# Altium PCB Statron_RP2040.PcbDoc
Units mil, origin at the board's own origin, x right, y up, seen from the top; angles counter-clockwise.
Board outline 1075 x 1465 mil, 2 copper layers (Top Layer, Bottom Layer); 66 components, 43 nets, 215 pads, 76 vias.
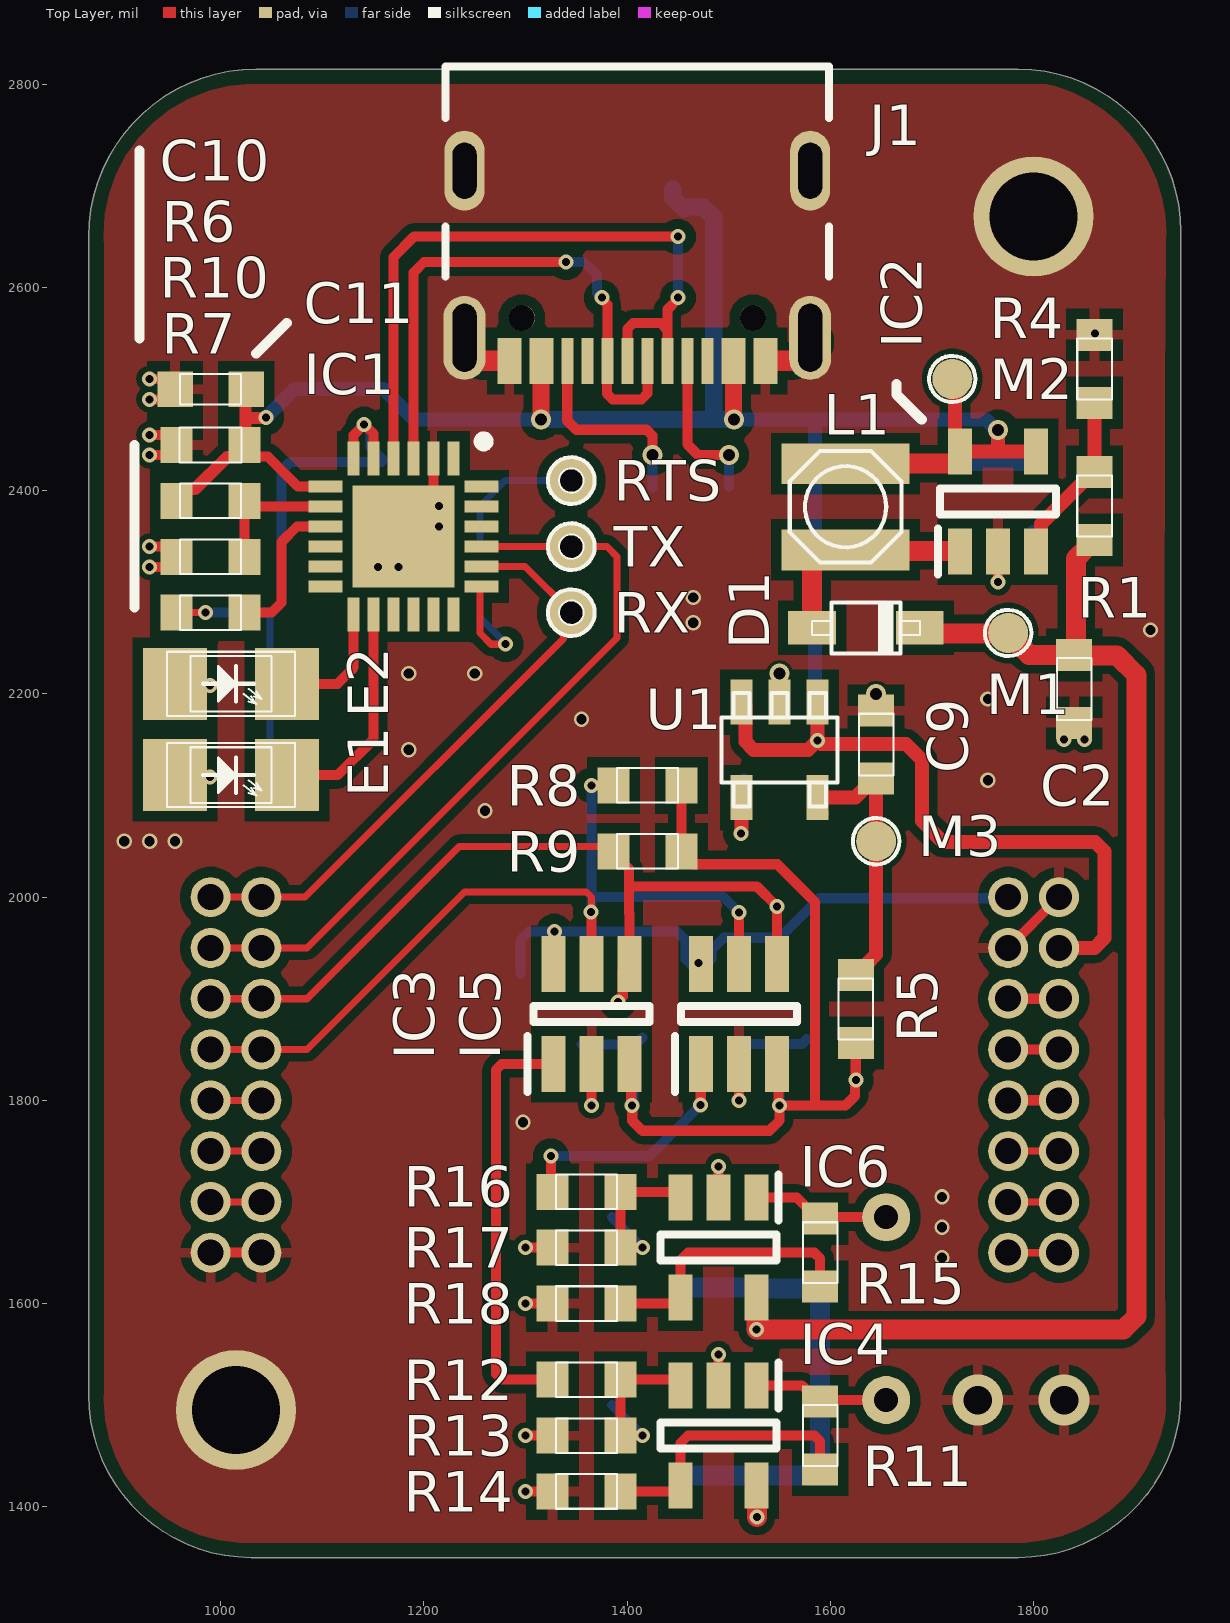
[diagram p0: Top Layer view]
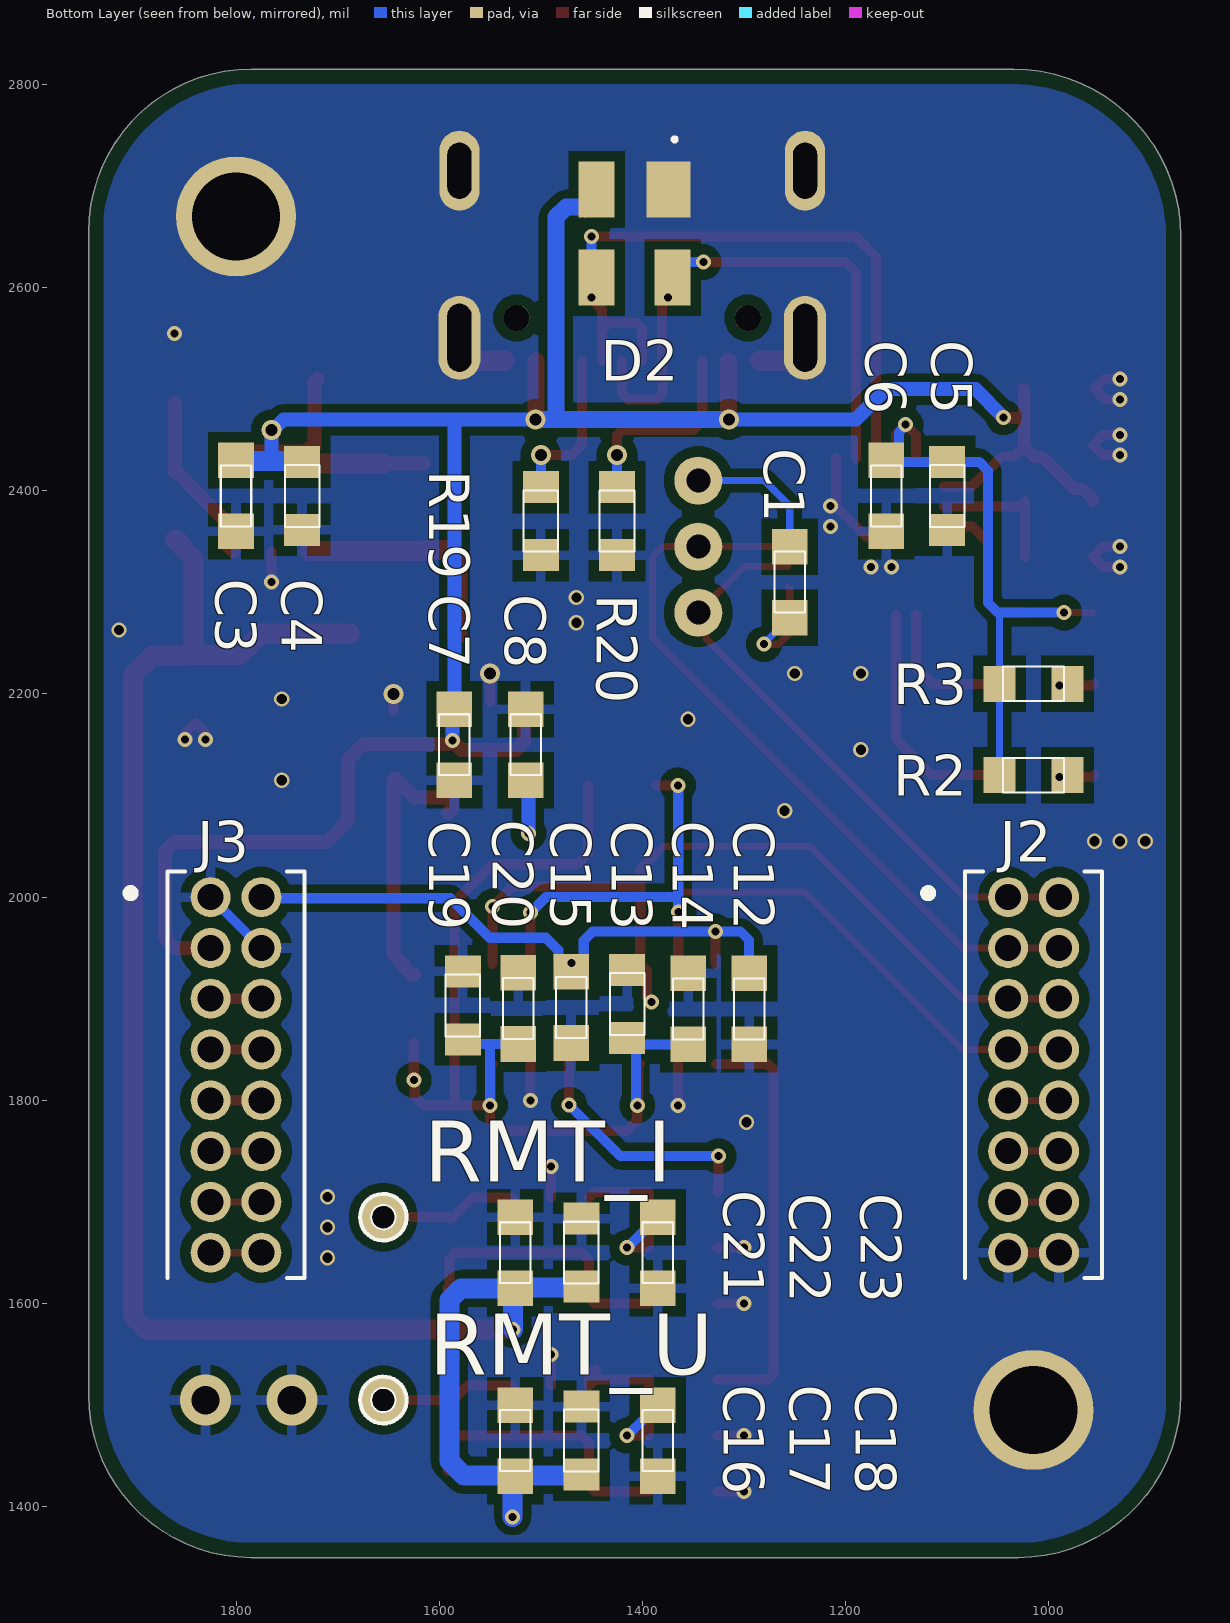
[diagram p1: Bottom Layer view, seen from below]
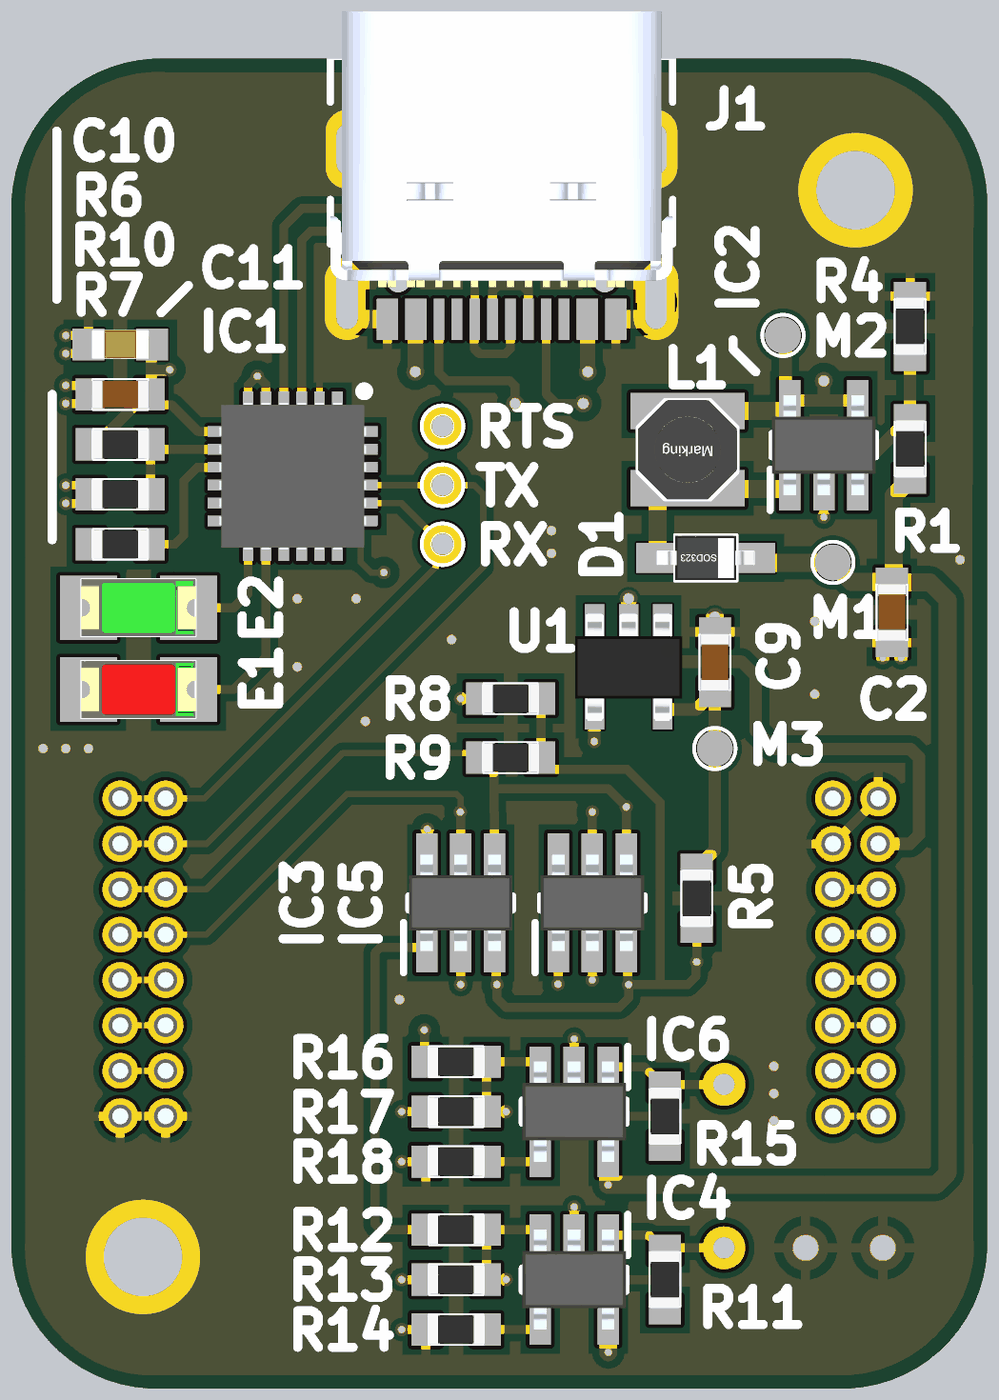
[diagram p2: 3D render of the assembled board from above, using the file's embedded part models]
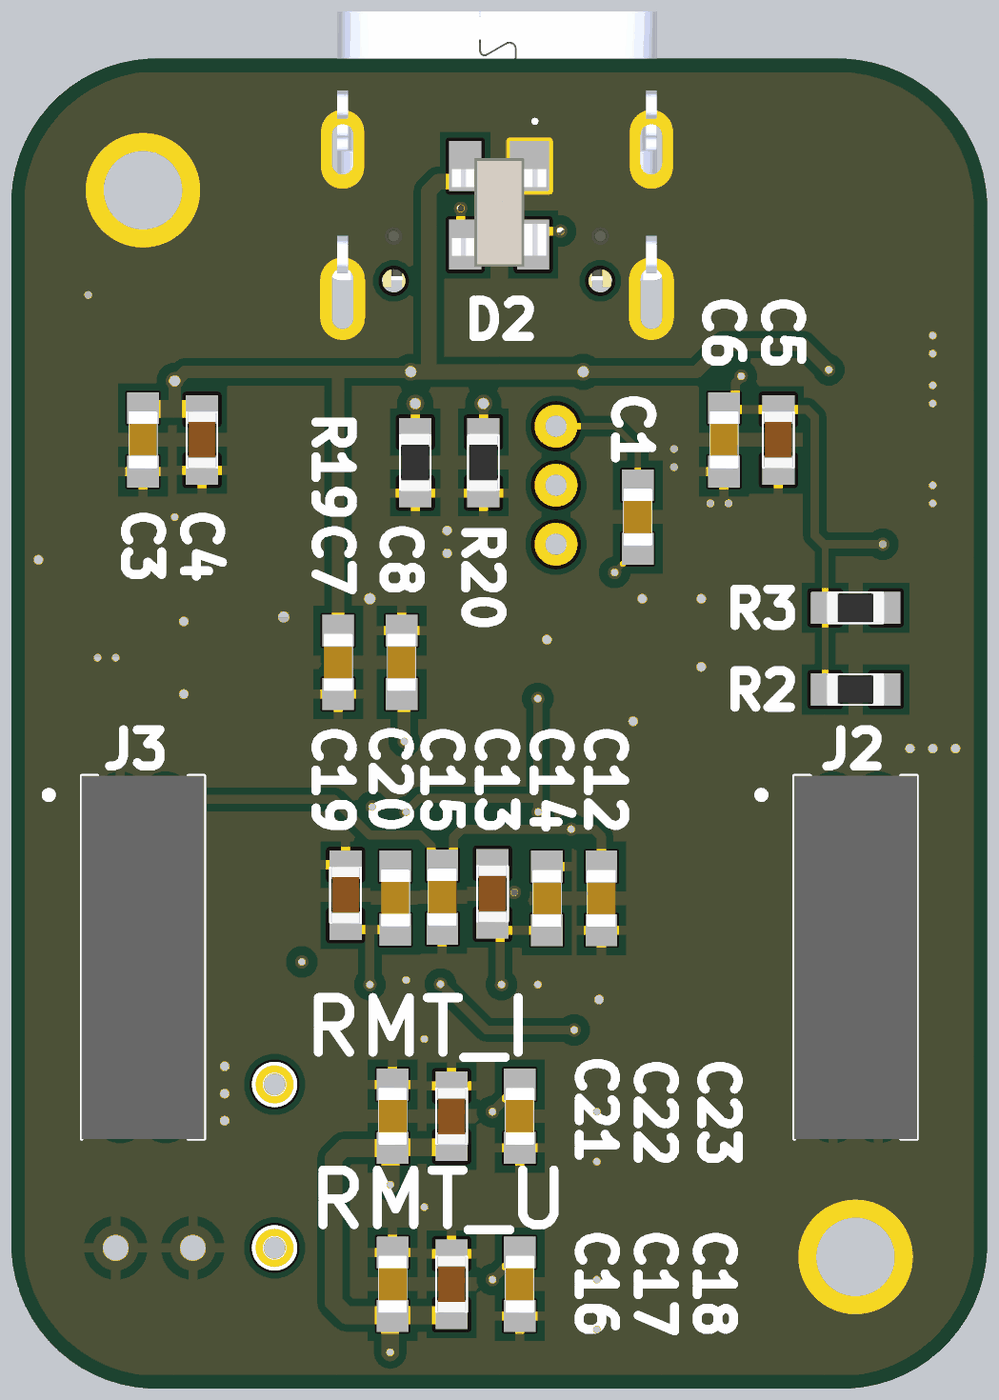
[diagram p3: 3D render of the assembled board from below, using the file's embedded part models]

## Layer stack, top to bottom
Top Solder: solder mask 0.4, Solder Resist, Dk 3.5
Top Layer: signal copper 1.4
Dielectric 1: dielectric 12.6, FR-4, Dk 4.8
Bottom Layer: signal copper 1.4
Bottom Solder: solder mask 0.4, Solder Resist, Dk 3.5

## Board outline
1035,2815 1785,2815 cw(c1785,2655) 1945,2655 1945,1510 cw(c1785,1510) 1785,1350 1030,1350 cw(c1030,1510) 870,1510 870,2650 cw(c1035,2650)

## Design rules (kind name [scope] priority, off if disabled: settings)
Clearance [All] p1: gap=10 ignorepadtopadclearanceinfootprint=FALSE except(5: Arc-Arc Arc-Track Arc-SMDPad Arc-Via Track-Track Track-SMDPad Track-Via SMDPad-SMDPad; 8: Arc-Fill Arc-Poly Arc-Region Arc-Text Track-Fill Track-Poly Track-Region Track-Text SMDPad-Text SMDPad-Hole THPad-Text Via-Text Fill-Text Poly-Text Region-Text Text-Text)
HoleSize [All] p1: absolutevalues=TRUE maxlimit=100 minlimit=7.87 maxpercent=80.000 minpercent=20.000
PolygonConnect [All] p1: connectstyle=Relief reliefconductorwidth=10 reliefentries=4 polygonreliefangle="90 Angle" airgapwidth=10
RoutingVias [All] p1: holewidth=28 width=50 viastyle="Through Hole" minholewidth=28 minwidth=50 maxholewidth=28 maxwidth=50
SilkToSilkClearance [All] p1: silktosilkclearance=5
SolderMaskExpansion [All] p1: expansion=4 istentingtop=FALSE
UnRoutedNet [All] p1: checkbadconnections=TRUE
Width [All] p1: maxlimit=40 minlimit=5 preferedwidth=16 minimp=50.000000 maximp=50.000000 favimp=50.000000
27 further rules are at their usual default settings.

## Components (designator, comment, footprint, x,y, rotation, side; value= is the part's Value field where it differs from the comment)
C1 "100n" C0603M 1255,2310 r270 bottom value=100n/16V
C2 "4u7" C0603 1840,2205 r90 top value=4u7/6,3V
C3 "100n" C0603M 1800,2395 r270 bottom value=100n/16V
C4 "4u7" C0603 1735,2395 r270 bottom value=4u7/6,3V
C5 "4u7" C0603 1100,2395 r270 bottom value=4u7/6,3V
C6 "100n" C0603M 1160,2395 r270 bottom value=100n/16V
C7 "100n" C0603M 1585,2150 r270 bottom value=100n/16V
C8 "10n" C0603M 1515,2150 r90 bottom
C9 "4u7" C0603 1645,2150 r90 top value=4u7/6,3V
C10 "4u7" C0603 990,2445 r180 top value=4u7/6,3V
C11 "100n" C0603M 990,2500 r180 top value=100n/16V
C12 "100n" C0603M 1295,1890 r270 bottom value=100n/16V
C13 "4u7" C0603 1415,1895 r270 bottom value=4u7/6,3V
C14 "100n" C0603M 1355,1890 r270 bottom value=100n/16V
C15 "100n" C0603M 1470.21,1891.43 r270 bottom value=100n/16V
C16 "100n" C0603M 1525,1465 r90 bottom value=100n/16V
C17 "4u7" C0603 1460,1465 r270 bottom value=4u7/6,3V
C18 "10n" C0603M 1385,1465 r270 bottom
C19 "4u7" C0603 1576.79,1893.53 r270 bottom value=4u7/6,3V
C20 "100n" C0603M 1522.05,1890.46 r270 bottom value=100n/16V
C21 "100n" C0603M 1525,1650 r90 bottom value=100n/16V
C22 "4u7" C0603 1460,1650 r270 bottom value=4u7/6,3V
C23 "10n" C0603M 1385,1650 r270 bottom
D1 "PMEG4005" SOD323 1635,2265 r0 top
D2 "SP0503BAHTG" SP0503BAHTG 1407.6,2653.31 r0 bottom
E1 "KP-3216ID" "LED1206 R" 1010,2120 r0 top value=Red
E2 "KP-3216SGD" "LED1206 G" 1010,2210 r0 top value=Green
IC1 "CP2102N-A02-GQFN24R" QFN50P400X400X80-25N-D 1180,2355 r270 top
IC2 "LM2703MF-ADJ_NOPB" SOT95P280X145-5N 1765,2389.21 r90 top
IC3 "MCP4726A3T-E_CH" SOT95P270X145-6N 1365,1885 r90 top
IC4 "OPA735AIDBVT" SOT95P280X145-5N 1490,1470 r270 top
IC5 "MCP4726A4T-E_CH" SOT95P270X145-6N 1510,1885 r90 top
IC6 "OPA735AIDBVT" SOT95P280X145-5N 1490,1655 r270 top
J1 "USB4105-GF-A" GCT_USB4105-GF-A 1410,2715 r180 top locked
J2 "20021111-00016T4LF" 2002111100016T4LF 1040,2000 r270 bottom locked
J3 "20021111-00016T4LF" 2002111100016T4LF 1825,2000 r270 bottom locked
L1 "10uH/630mA" L_HEXAGON_2.8x2.8_H1.3_SMD_WE-TPC_2813 1615,2384.21 r90 top
M1 "TP" "Pad 1mm SMD" 1775,2260 r90 top
M2 "TP" "Pad 1mm SMD" 1720,2510 r90 top
M3 "TP" "Pad 1mm SMD" 1645,2055 r270 top
R1 "180K" R0603 1860,2385 r270 top
R2 "1K" R0603 1015,2120 r180 bottom
R3 "1K" R0603 1015,2210 r180 bottom
R4 "27K" R0603 1860,2520 r270 top
R5 "0R" R0603 1625,1890 r90 top
R6 "22K" R0603 990,2390 r0 top
R7 "1K" R0603 990,2280 r180 top
R8 "22K" R0603 1420,2110 r180 top
R9 "22K" R0603 1420,2045 r180 top
R10 "47K" R0603 990,2335 r180 top
R11 "22K" R0603 1590,1470 r90 top
R12 "10K" R0603 1360,1525 r180 top
R13 "10K" R0603 1360,1470 r180 top
R14 "10K" R0603 1360,1415 r180 top
R15 "22K" R0603 1590,1650 r90 top
R16 "10K" R0603 1360,1710 r180 top
R17 "10K" R0603 1360,1655 r180 top
R18 "10K" R0603 1360,1600 r180 top
R19 "56K-50" R0603 1500,2370 r90 bottom
R20 "56K-50" R0603 1425,2370 r90 bottom
RMT_I "TP" Pad0.6mm 1655,1685 r90 bottom
RMT_U "TP" Pad0.6mm 1655,1505 r90 bottom
RTS "TP" Pad0.6mm 1345,2410 r0 top (schematic designator RTS1)
RX "TP" Pad0.6mm 1345,2280 r0 top (schematic designator UART_RX1)
TX "TP" Pad0.6mm 1345,2345 r0 top (schematic designator UART_TX1)
U1 "LP2985AIM5-3.3" SOT23-5 1550,2145 r180 top

## Footprints (in the part's own frame and the unit in brackets; to place one, negate y for a bottom-side part, rotate by r counter-clockwise, add the part's x,y. Pads: shape width x height; smd on the part's side, far side on the other; paste and mask are expansions set on the pad)
2002111100016T4LF [mm]
  round 1 hole 0.65: 1(0,0) 2(0,1.27) 3(1.27,0) 4(1.27,1.27) 5(2.54,0) 6(2.54,1.27) 7(3.81,0) 8(3.81,1.27) 9(5.08,0) 10(5.08,1.27) 11(6.35,0) 12(6.35,1.27) 13(7.62,0) 14(7.62,1.27) 15(8.89,0) 16(8.89,1.27)
  silkscreen extent -0.64,-2.1 9.53,2.35, body extent -0.64,-1.08 9.53,2.35, height 5.6
C0603 [mm] "Chip Capacitor 0603"
  rect 0.8x0.9 smd: 1(-0.85,0) 2(0.85,0)
  silkscreen extent -0.77,-0.43 0.77,0.43, body extent -0.8,-0.4 0.8,0.4, height 0.6
C0603M [mil]
  rect 35x35 smd mask+2: 1(-35,0) 2(35,0)
  silkscreen extent -30,-15 30,15, body extent -31,-16 31,16, height 35
GCT_USB4105-GF-A [mm]
  rect 0.6x1.15 smd: A1_B12(-3.2,4.755) A4_B9(-2.4,4.755) B1_A12(3.2,4.755) B4_A9(2.4,4.755)
  rect 0.3x1.15 smd: A5(-1.25,4.755) A6(-0.25,4.755) A7(0.25,4.755) A8(1.25,4.755) B5(1.75,4.755) B6(0.75,4.755) B7(-0.75,4.755) B8(-1.75,4.755)
  oval 1.05x2.1 hole 0.6 slot 1.7 at 90 deg: S1(-4.32,4.18) S4(4.32,4.18)
  oval 1x2 hole 0.6 slot 1.4 at 90 deg: S2(-4.32,0) S3(4.32,0)
  round 0.65 hole 0.65 unplated: ""(-2.89,3.68) ""(2.89,3.68)
  silkscreen extent -4.79,-2.6 4.79,2.65, body extent -4.79,-3.86 4.79,3.86, height 3.31
L_HEXAGON_2.8x2.8_H1.3_SMD_WE-TPC_2813 [mil] "SMT power inductor"
  rect 40x126 smd: 1(-42.5,0) 2(42.5,0)
  silkscreen extent -55,-55 55,55, body extent -55,-55 55,55, height 48
"LED1206 G" [mm] "LED CASE 1206 .113 CTRS"
  rect 1.6x1.8 smd: 1(-1.4,0) 2(1.4,0)
  silkscreen extent -1.6,-0.8 1.6,0.8, body extent -1.61,-0.8 1.61,0.8, height 1.1
"LED1206 R" [mm] "LED CASE 1206 .113 CTRS"
  rect 1.6x1.8 smd: 1(-1.4,0) 2(1.4,0)
  silkscreen extent -1.6,-0.8 1.6,0.8, body extent -1.61,-0.8 1.61,0.8, height 1.1
Pad0.6mm [mm] "Pad (neosazuje se)"
  round 1.2 hole 0.6: 1(0,0)
  silkscreen extent -0.58,-0.58 0.58,0.58
"Pad 1mm SMD" [mm] "Pad (neosazuje se)"
  round 1 smd mask+0.051: 1(0,0)
  silkscreen extent -0.58,-0.58 0.58,0.58
QFN50P400X400X80-25N-D [mm]
  rect 0.85x0.3 smd: 1(-1.95,1.25) 2(-1.95,0.75) 3(-1.95,0.25) 4(-1.95,-0.25) 5(-1.95,-0.75) 6(-1.95,-1.25) 13(1.95,-1.25) 14(1.95,-0.75) 15(1.95,-0.25) 16(1.95,0.25) 17(1.95,0.75) 18(1.95,1.25)
  rect 0.3x0.85 smd: 7(-1.25,-1.95) 8(-0.75,-1.95) 9(-0.25,-1.95) 10(0.25,-1.95) 11(0.75,-1.95) 12(1.25,-1.95) 19(1.25,1.95) 20(0.75,1.95) 21(0.25,1.95) 22(-0.25,1.95) 23(-0.75,1.95) 24(-1.25,1.95)
  rect 2.55x2.55 smd: 25(0,0)
  silkscreen extent -2.5,1.88 -2.25,2.13, body extent -2.05,-2.05 2.05,2.05, height 0.8
R0603 [mm] "Chip Resistor 0603"
  rect 0.8x0.9 smd: 1(-0.85,0) 2(0.85,0)
  silkscreen extent -0.76,-0.43 0.76,0.43, body extent -0.8,-0.4 0.8,0.4, height 0.4
SOD323 [mil] "Schottky Barrier Rectifier"
  rect 47x33 smd paste+0 mask+2: 1(-53,0) 2(53,0)
  silkscreen extent -53,-25 53,25, body extent -53,-25 53,25, height 43
SOT23-5 [mil] "0,95 rozteè, 0,4mm mezera, 2.9x1,6mm"
  rect 21.65x44 smd mask+2: 1(-37.5,-47) 2(0,-47) 3(37.5,-47) 4(37.5,47) 5(-37.5,47)
  silkscreen extent -57,-56 57,56, body extent -59,-58 59,60, height 57
SOT95P270X145-6N [mm]
  rect 1.4x0.6 smd: 1(-1.25,0.95) 2(-1.25,0) 3(-1.25,-0.95) 4(1.25,-0.95) 5(1.25,0) 6(1.25,0.95)
  silkscreen extent -1.95,-1.45 0.2,1.6, body extent -1.35,-1.45 1.35,1.45, height 1.45
SOT95P280X145-5N [mm]
  rect 1.15x0.6 smd: 1(-1.25,0.95) 2(-1.25,0) 3(-1.25,-0.95) 4(1.25,-0.95) 5(1.25,0.95)
  silkscreen extent -1.83,-1.45 0.33,1.5, body extent -1.4,-1.45 1.4,1.45, height 1.45
SP0503BAHTG [mm]
  rect 1.1x1.4 smd: 1(-0.85,-1.1)
  rect 0.9x1.4 smd: 2(0.95,-1.1) 3(0.95,1.1) 4(-0.95,1.1)
  silkscreen extent -1.05,-2.4 -0.95,-2.3, body extent -1.32,-1.32 1.32,1.72, height 1.23

## Part data
C1 C3 C6 C11 C12 C14 C15 C16 C20 C21: library part CMP-UN-000268-1, "Ceramic Capacitor X7R", Manufacturer=VISHAY, Manufacturer Part Number="100n/16V X7R C0603", Category="Capacitors CERA SMD", Component Type=Capacitors, Main=Capacitors, Part Number="100n/16V X7R C0603", SMD/THD=SMD, Status=X, Stock number=10003450
C2 C4 C5 C9 C10 C13 C17 C19 C22: library part CMP-UN-000401-1, "Ceramic Capacitor X5R", Manufacturer=Murata, Manufacturer Part Number=GRM188R60J475KE19J, Category="Capacitors CERA SMD", Component Type=Capacitors, ComponentLink1Description=Datasheet, ComponentLink1URL=http://datasheet.octopart.com/GRM188R60J475KE19J-Murata-datasheet-14401031.pdf, Main=Capacitors, Part Number=GRM188R60J475KE19J, SMD/THD=SMD, Status=T, Stock number=10006168
C7: library part UniversalCapacitor, "Ceramic Capacitor X7R", Manufacturer=VISHAY, Part Number="100n/16V X7R C0603", Category="Capacitors CERA SMD", Main=Capacitors, SMD/THD=SMD, Status=X, Stock number=10003450
C8 C18 C23: library part UniversalCapacitor, "Ceramic Capacitor X7R", Manufacturer=VISHAY, Part Number="10n/50V X7R C0603", Category="Capacitors CERA SMD", Main=Capacitors, SMD/THD=SMD, Status=A, Stock number=10002497
D1: library part CMP-UN-000984-1, "Schottky Diode 40V, 500mA", Manufacturer=NXP, Part Number=PMEG4005AEA, Category=Schottky, ComponentLink1Description=Datasheet, ComponentLink1URL=http://www.farnell.com/datasheets/684565.pdf, Main=Diodes, SMD/THD=SMD, Status=A, Stock number=10004763
D2: "TVS Diode (Uni-directional)", Manufacturer_Name=LITTELFUSE, Height=1.22mm, Manufacturer_Part_Number=SP0503BAHTG
E1: library part CMP-UN-001017-1, "SMD LED Red", Manufacturer=KINGBRIGHT, Category=LED, ComponentLink1Description=Datasheet, ComponentLink1URL=http://www.tme.eu/en/details/kp-3216id/smd-leds-1206/kingbright-electronic/, Main=Diodes, Part Number=KP-3216ID, SMD/THD=SMD, Status=A, Stock number=10005421
E2: library part CMP-UN-001018-1, "SMD LED Green", Manufacturer=KINGBRIGHT, Category=LED, ComponentLink1Description=Datasheet, ComponentLink1URL=http://www.tme.eu/en/details/kp-3216sgd/smd-leds-1206/kingbright-electronic/, Main=Diodes, Part Number=KP-3216SGD, SMD/THD=SMD, Status=A, Stock number=10005422
IC1: "Integrated Circuit", Manufacturer_Name="Silicon Labs", Mouser2 Part Number=634-CP2102NA02QFN24R, Datasheet Link=https://componentsearchengine.com//CP2102N-A02-GQFN24R.pdf, Height=0.8mm, Manufacturer_Part_Number=CP2102N-A02-GQFN24R, Mouser2 Price/Stock=https://www.mouser.com/Search/Refine.aspx?Keyword=634-CP2102NA02QFN24R
IC2: "Integrated Circuit", Manufacturer_Name="Texas Instruments", Manufacturer_Part_Number=LM2703MF-ADJ/NOPB, Datasheet Link=https://datasheet.datasheetarchive.com/originals/distributors/Datasheets-SFU2/DSASFU100036636.pdf, Height=1.45mm
IC3: "Integrated Circuit", Manufacturer_Name=Microchip, Manufacturer_Part_Number=MCP4726A3T-E/CH, Mouser2 Part Number=579-MCP4726A3TECH, Datasheet Link=https://componentsearchengine.com//MCP4726A3T-E_CH.pdf, Height=1.45mm, Mouser2 Price/Stock=https://www.mouser.com/Search/Refine.aspx?Keyword=579-MCP4726A3TECH
IC4 IC6: "Integrated Circuit", Manufacturer_Name="Texas Instruments", Mouser2 Part Number=595-OPA735AIDBVT, Datasheet Link=http://www.ti.com/lit/gpn/opa735, Height=1.45mm, Manufacturer_Part_Number=OPA735AIDBVT, Mouser2 Price/Stock=https://www.mouser.com/Search/Refine.aspx?Keyword=595-OPA735AIDBVT
IC5: library part MCP4726A3T-E_CH, "Integrated Circuit", Manufacturer_Name=Microchip, Manufacturer_Part_Number=MCP4726A3T-E/CH, Mouser2 Part Number=579-MCP4726A3TECH, Datasheet Link=https://componentsearchengine.com//MCP4726A3T-E_CH.pdf, Height=1.45mm, Mouser2 Price/Stock=https://www.mouser.com/Search/Refine.aspx?Keyword=579-MCP4726A3TECH
J1: "USB-C (USB TYPE-C) USB 2.0 Receptacle Connector 24 (16+8 Dummy) Position Surface Mount, Right Angle; Through Hole", Package=None, Availability=Warning, Check_prices=https://www.snapeda.com/parts/USB4105-GF-A/Global%20Connector%20Technology/view-part/4423780/?ref=eda, MF=GCT, MP=USB4105-GF-A, Price=None, Purchase-URL=https://pricing.snapeda.com/search/part/USB4105-GF-A/?ref=eda, SnapEDA_Link=https://www.snapeda.com/parts/USB4105-GF-A/Global%20Connector%20Technology/view-part/4423780/?ref=snap
J2 J3: "Connector", Manufacturer_Name=Amphenol, Datasheet Link=https://cdn.amphenol-icc.com/media/wysiwyg/files/drawing/20021111.pdf, Height=5.5mm, Manufacturer_Part_Number=20021111-00016T4LF
L1: library part CMP-UN-002654-1, "SMT power inductor WE-TPC_2813", Manufacturer="Würt Elektronik", Part Number=744029100, Category=Inductors, ComponentLink1Description=Datasheet, ComponentLink1URL=http://datasheet.octopart.com/744029100-W%C3%BCrth-Elektronik-datasheet-41342342.pdf, Main=Inductors
M1 M2 M3: library part "M Point", "Test Point", Category=Pads_Pins_Measure_Points, Main=Mechanical, Stock number=--------
R1: library part CMP-UN-002024-2, "Resistor 1%, 0.1W, 75V", Manufacturer=VISHAY, Part Number="180K R0603", Category="Resistors SMD", Main=Resistors, SMD/THD=SMD, Status=T, Stock number=10005169
R2 R3 R7: library part CMP-UN-001963-2, "Resistor 1%, 0.1W, 75V", Manufacturer="Vishay Dale", Manufacturer Part Number=CRCW06031K00FKEA, Part Number="1K R0603", Category="Resistors SMD", Component Type=Resistors, Main=Resistors, SMD/THD=SMD, Status=A, Stock number=10004641
R4: library part CMP-UN-001976-2, "Resistor 1%, 0.1W, 75V", Manufacturer=VISHAY, Part Number="27K R0603", Category="Resistors SMD", Main=Resistors, SMD/THD=SMD, Status=A, Stock number=10004689
R5: library part CMP-UN-002043-2, "Resistor 1%, 0.1W, 75V", Manufacturer=VISHAY, Part Number="0R R0603", Category="Resistors SMD", Main=Resistors, SMD/THD=SMD, Status=A, Stock number=10005433
R6 R8 R9 R11 R15: library part CMP-UN-001981-2, "Resistor 1%, 0.1W, 75V", Manufacturer=VISHAY, Part Number="22K R0603", Category="Resistors SMD", Main=Resistors, SMD/THD=SMD, Status=A, Stock number=10004787
R10: library part CMP-UN-001972-2, "Resistor 1%, 0.1W, 75V", Manufacturer=VISHAY, Part Number="47K R0603", Category="Resistors SMD", Main=Resistors, SMD/THD=SMD, Status=A, Stock number=10004685
R12 R13 R14 R16 R17 R18: library part CMP-UN-001953-2, "Resistor 1%, 0.1W, 75V", Manufacturer="Vishay Semiconductors", Manufacturer Part Number=CRCW060310K0FKEAC, Part Number="10K R0603", Category="Resistors SMD", Component Type=Resistors, Main=Resistors, SMD/THD=SMD, Status=A, Stock number=10004622
R19 R20: library part CMP-UN-001948-2, "Resistor 1%, 0.1W, 75V, 50ppm", Manufacturer=Vishay, Part Number=CRCW060356K0FHEAP, Category="Resistors SMD", ComponentLink1Description=Datasheet, ComponentLink1URL=http://www.vishay.com/docs/20036/dcrcwpe3.pdf, Main=Resistors, SMD/THD=SMD, Status=A, Stock number=10004617
RMT_I RMT_U RTS RX TX: library part CMP-UN-002500-5, "Test Point", Category=Pads_Pins_Measure_Points, Component Type=Mechanical, Main=Mechanical, Stock number=--------
U1: library part LP2985_SOT25, "150-mA , Low-Dropout Regulator", Manufacturer="Texas Instruments", Part Number=LP2985AIM5-3.3/NOPB, Category="Voltage Regulators", ComponentLink1Description=Datasheet, ComponentLink1URL=http://www.farnell.com/datasheets/1972829.pdf, Main=IC's, SMD/THD=SMD, Status=N, Stock number=10006099

## Free pads (board coordinates)
  round 118.11 hole 86.61: 1(1015,1495) 2(1800,2670)

## Via types
v1: diameter 14.76, hole 7.87, Top Layer to Bottom Layer, tented both sides, 49 vias
v2: diameter 15, hole 10, Top Layer to Bottom Layer, tented both sides, 17 vias
v3: diameter 19.68, hole 11.81, Top Layer to Bottom Layer, tented both sides, 7 vias
v4: diameter 50, hole 28, Top Layer to Bottom Layer, tented both sides, 2 vias
v5: diameter 15, hole 8, Top Layer to Bottom Layer, tented both sides, 1 vias

## Nets (pads, with @x,y where several pads share a name; then routed paths per layer and width w, separated by ;. In a path a pad name is that pad's centre, name@x,y a point inside that pad or via, vN(x,y) a via of type N, cw(c..) or ccw(c..) an arc to the next point about the centre after c; other vN are vias at no path point)
+3.3V: J2.13 J2.14 | length 50
  Top Layer w7: J2.14 J2.13
+3V3: C13.2 C14.2 C19.2 C20.2 IC3.3 IC5.3 R5.1 R8.1 R9.1 | length 1057.5
  Top Layer w10: IC3.3 1404.09,1834.1 1404.09,1795.91 v1(1405,1795) 1405,1780 1415,1770 1540,1770 1550,1780 v1(1550,1795) ; R8.1 R9.1 1453.46,2043.03 1464.21,2032.28 1547.72,2032.28 1585,1995 1585,1795 ; IC5.3 1549.09,1834.1 1549.09,1795.91 v1(1550,1795) ; R5.1 v1(1625,1820) 1624.09,1819.09 1624.09,1804.09 1615,1795 1585,1795 ; v1(1550,1795) 1585,1795
  Bottom Layer w10: C14.2 C13.2@1408.46,1855 ; v1(1405,1795) 1405,1796.29 1406.35,1797.64 1406.35,1852.89 C13.2@1408.46,1855 ; C13.2 C13.2@1408.46,1855 ; C20.2 1550.46,1855.46 ; v1(1550,1795) 1550,1855 1550.46,1855.46 ; C19.2 1572.19,1855.46 1550.46,1855.46
+10V: C2.2 C16.1 C17.2 C21.1 C22.2 D1.2 IC4.5 IC6.5 M1.1 R1.2 | length 1938.8
  Top Layer w19.68: IC4.5 1527.66,1420.53 v1(1527.66,1389.93) ; IC6.5 v1(1527.43,1574.39) 1888.41,1574.39 1901.3,1587.28 1901.3,2218.7 1881.96,2238.04 1847.87,2238.04 1847.45,2238.46 C2.2@1841.97,2238.46 ; D1.2@1688,2259.21 1688.39,2259.61 1774.61,2259.61 M1.1 1775,2259.09 1795.62,2238.46 C2.2@1841.97,2238.46 ; R1.2 1858.03,2351.54 1852.13,2345.63 1852.13,2343.66 1841.97,2333.5 C2.2@1841.97,2238.46
  Bottom Layer w19.68: C17.2 1460.77,1430.77 1575.77,1430.77 1590,1445 1590,1603.47 1578.47,1615 C21.1 ; C22.2 1460.77,1615.77 1524.23,1615.77 C21.1 ; C16.1 1527.66,1427.34 v1(1527.66,1389.93) ; v1(1527.43,1574.39) 1527.43,1612.57 C21.1
GND: C2.1 C3.2 C4.2 C5.2 C6.2 C7.2 C8.2 C9.2 C10.2 C11.2 C12.2 C13.1 C14.1 C15.2 C16.2 C17.1 C18.2 C19.1 C20.1 C21.2 C22.1 C23.2 D2.1 IC1.2 IC1.25 IC2.2 IC3.2 IC4.2 IC5.2 IC6.2 J1.A1_B12 J1.B1_A12 J1.S1 J1.S2 J1.S3 J1.S4 J2.15 J2.16 J3.1 J3.4 pad.1 pad.2 R4.1 R10.2 R13.2 R14.2 R17.2 R18.2 R19.1 R20.1 U1.2 | length 961.3
  Top Layer w9.84: v1(930,2325) 946.54,2325 R10.2 946.54,2345 v1(930,2345) ; v1(930,2435) 946.54,2435 C10.2 946.54,2455 v1(930,2455) ; v1(930,2490) 945,2490 C11.2 945,2510 v1(930,2510) ; J2.16 J2.15 ; IC1.25 1209.53,2384.53 IC1.2 ; J1.S4 1239.92,2542.34 J1.S4@1254.47,2527.8 ; J1.S4@1249.92,2542.34 J1.S4@1249.92,2550.43 ; v1(1300,1415) R14.2 ; v1(1300,1470) R13.2 ; v1(1300,1600) R18.2 ; v1(1300,1655) R17.2 ; v1(1365,1795) IC3.2 ; IC4.2 v1(1490,1550) ; IC6.2 v1(1490,1735) ; v1(1510,1800) IC5.2 ; U1.2 v3(1550,2220) ; J1.S1@1565.53,2527.8 1580.08,2542.34 J1.S1 ; J1.S1@1590.08,2542.34 J1.S1@1590.08,2550.43 ; C9.2 v3(1645,2200) ; v1(1765,2310) IC2.2 ; J3.4 J3.1 ; v1(1830,2155) 1830,2161.54 C2.1 ; C2.1@1840,2170 C2.1 ; v1(1850,2155) 1850,2161.54 C2.1 ; R4.1 1860,2554.27 v1(1860.33,2554.6)
  Top Layer w20: J1.S4@1254.47,2527.8 J1.B1_A12 ; J1.A1_B12 J1.S1@1565.53,2527.8
  Bottom Layer w9.84: C6.2@1158.46,2361.54 C6.2 ; J3.4 J3.1 ; C3.2@1798.46,2361.54 C3.2
  other v1: 1155,2325 1175,2325 1215,2365 1215,2385
  other v2: 1710,1645 1710,1675 1710,1705 1297.6,1778.46 905,2055 930,2055 955,2055 1260,2085 1755,2115 1185,2145 1355,2175 1755,2195 1185,2220 1250,2220 1915.06,2262.92 1465,2270 1465,2295
  other v4: 1745,1505 1830,1505
NetC1_1: C1.1 RTS.1 | length 140.4
  Bottom Layer w7: C1.1 1255,2385 1280,2410 RTS.1
NetC1_2: C1.2 IC1.19 | length 112.5
  Top Layer w7: IC1.19 1256.77,2305.15 1255,2303.38 1255,2260 1266.07,2248.93 v1(1280.42,2248.93)
  Bottom Layer w7: C1.2 v1@1280.42,2249.58
NetC8_1: C8.1 U1.4 | length 88.8
  Top Layer w13.78: v1(1512.15,2062.77) 1512.32,2062.95 1512.32,2097.82 U1.4
  Bottom Layer w13.78: v1(1512.15,2062.77) 1512.34,2062.96 1512.34,2112.34 C8.1
NetC9_1: C9.1 M3.1 R5.2 U1.5 | length 283.3
  Top Layer w13.78: U1.5@1591.44,2082.89 1587.5,2086.83 U1.5 1624.5,2098 1643.03,2116.54 1645,2114.57 M3.1 1645,1943.46 1635.83,1934.29 1635.83,1932.32 1626.97,1923.46 R5.2
NetC18_1: C18.1 IC4.3 R12.1 R13.1 | length 207
  Top Layer w9.84: v1(1415,1470) R13.1 R12.1 1446.81,1525 IC4.3 IC4.3@1452.6,1528.11 ; IC4.3@1445.71,1535 IC4.3@1452.6,1528.11 ; IC4.3@1455,1535 1452.6,1532.6 IC4.3@1452.6,1528.11
  Bottom Layer w9.84: C18.1 1397.58,1487.42 v1(1415,1470)
NetC23_1: C23.1 IC6.3 R16.1 R17.1 | length 180.5
  Top Layer w9.84: v1(1415,1655) R17.1 R16.1 1446.81,1710 IC6.3
  Bottom Layer w9.84: C23.1 v1(1415,1655)
NetD1_1: D1.1 IC2.1 L1.1 | length 222.9
  Top Layer w19.68: D1.1@1582,2259.21 1582,2331.56 1592.16,2341.71 L1.1 1615.86,2340.86 1726.74,2340.86 IC2.1
NetD2_3: D2.3 IC1.4 J1.A7 J1.B7 | length 689.3
  Top Layer w9.84: IC1.4 1170.16,2630.16 1190,2650 v1(1450,2650) ; J1.A7 1400.16,2559.23 1405.92,2565 1432.78,2565 1439.53,2558.25 ; J1.B7 1439.53,2558.25 ; v1@1449.76,2589.76 v1(1450,2590) 1450,2588.67 1439.53,2578.2 1439.53,2558.25
  Bottom Layer w9.84: v1(1450,2590) v1(1450,2650)
NetD2_4: D2.4 IC1.3 J1.A6 J1.B6 | length 569.9
  Top Layer w9.84: IC1.3 1189.84,2614.84 1200,2625 v1(1340,2625) ; v1@1375.94,2589.06 v1(1375,2590) 1375,2588.67 1380.47,2583.2 J1.B6 1380,2527.32 1380,2495.61 1385.77,2489.84 1414.08,2489.84 1419.84,2495.61 J1.A6
  Bottom Layer w9.84: v1(1340,2625) 1357.4,2625 D2.4@1370.2,2612.2 ; D2.4 1370.2,2594.8 v1(1375,2590)
NetE1_1: E1.1 R2.2 | length 35.3
  Top Layer w9.84: E1.1 956.56,2118.32 v1(989.48,2118.32)
NetE1_2: E1.2 IC1.14 | length 222.8
  Top Layer w9.84: E1.2 1115,2120 1150.47,2155.47 IC1.14
NetE2_1: E2.1 R3.2 | length 35.3
  Top Layer w9.84: E2.1 956.56,2208.32 v5(989.48,2208.32)
NetE2_2: E2.2 IC1.13 | length 124.7
  Top Layer w9.84: E2.2 1115,2210 1130.79,2225.79 IC1.13
NetIC1_8: IC1.8 R6.2 R10.1 | length 137
  Top Layer w9.84: R10.1 R6.2 1028.94,2384.53 IC1.8
NetIC1_9: IC1.9 R7.1 | length 149.9
  Top Layer w9.84: R7.1 1050,2280 1060,2290 1060,2349.68 1075.16,2364.84 IC1.9
NetIC1_20: IC1.20 J2.1 J2.2 RX.1 | length 588.5
  Top Layer w7: J2.2 J2.1 1082.92,2000 1337.3,2254.38 1337.3,2272.3 RX.1 1299.53,2325.47 IC1.20
NetIC1_21: IC1.21 J2.3 J2.4 TX.1 | length 743.8
  Top Layer w7: J2.4 J2.3 1085,1950 1390,2255 1390,2335 1380,2345 TX.1 1344.92,2345.08 1256.85,2345.08 IC1.21
NetIC2_3: IC2.3 R1.1 R4.2 | length 170.3
  Top Layer w13.78: IC2.3 1807.32,2344.92 1807.32,2367.04 1849.17,2408.89 1849.17,2409.61 1858.03,2418.46 R1.1@1858.75,2418.46 ; R1.1 R4.2
NetIC3_1: IC3.1 R12.2 | length 416.6
  Top Layer w9.84: R12.2 1276.55,1525 1270.79,1530.77 1270.79,1830.02 1276.55,1835.79 IC3.1
NetIC3_4: IC3.4 IC5.4 J2.5 J2.6 R9.2 | length 829.8
  Top Layer w7: J2.6 J2.5 1085,1900 1235,2050 1379.57,2050 R9.2@1386.54,2043.03
  Top Layer w10: R9.2@1386.54,2043.03 1401.94,2027.62 1401.94,2010 ; v1(1390.94,1896.53) 1390.94,1897.82 1395.59,1902.47 1395.59,1927.4 IC3.4 1402.17,1934.44 1402.17,1984.17 1401.94,1984.4 1401.94,2010 ; IC5.4 v1(1547.42,1990.75) 1527.6,2010.57 1402.51,2010.57 1401.94,2010
NetIC3_5: IC3.5 IC5.5 J2.7 J2.8 R8.2 | length 856.3
  Top Layer w7: J2.8 1085,1850 1240,2005 1360,2005 1365,2000 1365,1985.56 v1(1364.56,1985.12)
  Top Layer w10: v1(1364.56,1985.12) 1364.78,1984.9 1364.78,1934.43 IC3.5 ; v1(1365,2110) R8.2 ; IC5.5 v1(1510,1985)
  Bottom Layer w10: v1(1364.56,1985.12) 1364.78,1985.34 1364.78,1999.78 ; v1(1365,2110) 1364.78,2109.78 1364.78,1999.78 ; v1(1510,1985) 1495,2000 1365,2000 1364.78,1999.78
NetIC4_1: IC4.1 R11.2 RMT_U.1 | length 134.8
  Top Layer w9.84: IC4.1 1572.28,1519.21 1588.03,1503.46 R11.2 1591.54,1505 RMT_U.1
NetIC4_4: IC4.4 R11.1 R14.1 | length 276.1
  Top Layer w9.84: R14.1 1446.81,1415 IC4.4 1452.6,1462.6 1460,1470 1584.23,1470 1590,1464.23 R11.1 R11.1@1591.54,1435
NetIC5_1: IC5.1 R16.2 | length 244.2
  Top Layer w9.84: v1(1325,1745) 1325,1711.54 R16.2
  Top Layer w10: v1(1472.2,1795.51) 1472.4,1795.71 1472.4,1835.59 IC5.1
  Bottom Layer w9.84: v1(1325,1745) 1421.69,1745 v1(1472.2,1795.51)
NetIC6_1: IC6.1 R15.2 RMT_I.1 | length 136.8
  Top Layer w9.84: IC6.1 1567.28,1704.21 1588.03,1683.46 R15.2 1591.54,1685 RMT_I.1
NetIC6_4: IC6.4 R15.1 R18.1 | length 271.1
  Top Layer w9.84: R18.1 1446.81,1600 IC6.4 1452.6,1642.6 1460,1650 1584.23,1650 1590,1644.23 R15.1
  Top Layer w10: R15.1 R15.1@1591.54,1615
NetJ1_A5: J1.A5 R19.2 | length 158.1
  Top Layer w9.84: J1.A5 1459.21,2445.79 1470,2435 v3@1499.31,2435
  Bottom Layer w9.84: R19.2 v3(1500,2435)
NetJ1_B5: J1.B5 R20.2 | length 204.6
  Top Layer w10: J1.B5 1341.1,2468.9 1350,2460 1419.14,2460 1425,2454.14 v3(1425,2435) v3@1425,2430
  Bottom Layer w10: R20.2 v3(1425,2435)
NetJ2_9: J2.9 J2.10 | length 50
  Top Layer w7: J2.10 J2.9
NetJ2_11: J2.11 J2.12 | length 50
  Top Layer w7: J2.12 J2.11
NetJ3_5: J3.5 J3.6 | length 50
  Top Layer w10: J3.6 J3.5
NetJ3_7: J3.7 J3.8 | length 50
  Top Layer w10: J3.8 J3.7
NetJ3_9: J3.9 J3.10 | length 50
  Top Layer w10: J3.10 J3.9
NetJ3_11: J3.11 J3.12 | length 50
  Top Layer w7: J3.12 J3.11
NetJ3_13: J3.13 J3.14 | length 50
  Top Layer w7: J3.14 J3.13
NetJ3_15: J3.15 J3.16 | length 50
  Top Layer w7: J3.16 J3.15
VBUS: C3.1 C4.1 C7.1 C10.1 C11.1 D2.2 IC1.7 IC2.4 IC2.5 J1.A4_B9 J1.B4_A9 J3.3 L1.2 M2.1 R6.1 U1.1 U1.3 | length 2762.1
  Top Layer w9.84: C10.1 1023.46,2444.27 1034.29,2433.44 1046.56,2433.44 1075.79,2404.21 IC1.7
  Top Layer w12: R6.1 956.54,2391.97 966.28,2401.72 974.76,2401.72 1006.33,2433.28 1013.72,2433.28 1023.46,2443.03 C10.1 1024.23,2445.77 1024.23,2470 ; C11.1 1024.23,2499.23 1024.23,2470 ; v1(1044.59,2472.23) 1044.06,2471.7 1025.93,2471.7 1024.23,2470
  Top Layer w13.78: v3(1315,2470) v3@1315.26,2470.26 ; J1.B4_A9@1315.26,2527.54 J1.B4_A9 ; J1.A4_B9 J1.A4_B9@1504.74,2527.54 ; v3@1504.74,2470.26 v3(1505,2470) ; U1.3 1516.44,2188.06 1516.44,2153.07 1524.51,2145 1577.92,2145 v1(1587.12,2154.2) 1587.31,2154.39 1587.31,2191.81 U1.1 ; v1@1587.31,2154.01 1587.58,2154.01 1590.92,2150.67 1674.33,2150.67 1690,2135 1690,2075 1710.64,2054.36 1860.64,2054.36 1870,2045 1870,1960 1860,1950 J3.3 ; L1.2 L1.2@1655,2426.71 ; M2.1 1722.68,2507.32 1722.68,2443.35 IC2.5 1765,2438.43 ; v3(1765,2460) 1765,2438.43 ; IC2.4 1765,2438.43
  Top Layer w17: v3@1315.26,2470.26 J1.B4_A9@1315.26,2527.54 ; v3@1504.74,2470.26 J1.A4_B9@1504.74,2527.54
  Top Layer w19.68: L1.2@1655,2426.71 1725.63,2426.71 1727.6,2428.68 IC2.5
  Bottom Layer w13.78: v1(1044.59,2472.23) 1072.37,2500 1160,2500 1190,2470 v3(1315,2470) ; D2.2@1445,2686.77 D2.2@1455.83,2675.94 ; v3(1505,2470) 1585,2470 ; v1(1587.12,2154.2) 1586.94,2154.39 1586.94,2183.06 C7.1 1585,2470 ; 1765,2429.23 v3(1765,2460) 1763.4,2460 1753.4,2470 1585,2470
  Bottom Layer w17: v3(1315,2470) 1485.14,2470 ; D2.2 1445,2688.53 1454.22,2679.32 1475.04,2679.32 1485.14,2669.21 1485.14,2470 ; v3(1505,2470) 1485.14,2470
  Bottom Layer w19.68: C4.1 1735.77,2429.23 1765,2429.23 1799.23,2429.23 C3.1
VIO: C5.1 C6.1 IC1.5 IC1.6 R2.1 R3.1 R7.2 | length 620.3
  Top Layer w7: R7.2 v1(985,2280)
  Top Layer w9.84: IC1.6 1130.79,2454.85 v1(1141.08,2465.15) 1150.47,2455.75 IC1.5
  Bottom Layer w7: R2.1 R3.1 1048.46,2278.46 1050,2280
  Bottom Layer w9.84: v1(985,2280) 1050,2280 1060,2290 1060,2420 1068.46,2428.46 C5.1 1158.46,2428.46 C6.1 1147.42,2442.58 1147.42,2457.47 1141.08,2463.81 v1(1141.08,2465.15)
VREF: C12.1 C15.1 IC3.6 IC5.6 J3.2 | length 611.2
  Top Layer w10: IC3.6 1327.94,1934.56 1327.94,1965.84 v1(1328.29,1966.18)
  Bottom Layer w10: C12.1 1295,1957.78 1303.4,1966.18 1448.82,1966.18 1457.71,1957.29 1457.71,1938.93 1464.14,1932.5 C15.1@1467.5,1932.5 ; v1(1470,1935) 1470,1926.64 C15.1 ; C15.1@1470.21,1935.21 1478.99,1935.21 1482.71,1938.93 1482.71,1947.71 1495,1960 1550.15,1960 1589.06,1998.9 1773.9,1998.9 J3.2
pads on no net: IC1.1 IC1.10 IC1.11 IC1.12 IC1.15 IC1.16 IC1.17 IC1.18 IC1.22 IC1.23 IC1.24 J1. J1.A8 J1.B8

## Polygon pours and split planes (outlines as drawn)
GND on Top Layer "GND_L01_P001" (solid, remove dead copper, pour order 1): 1040,2800 1813.06,2800 cw(c1779.75,2653.26) 1930,2645 ccw(c105553.73,2070) 1930,1495 cw(c1783.35,1512.32) 1783.34,1364.65 1027.67,1364.65 cw(c1025.32,1504.77) 885.54,1515 885.54,2640.19 cw(c1032.67,2652.54)
GND on Bottom Layer "GND_L02_P000" (solid, remove dead copper, pour order 0): 885,1495 885,2650 cw(c1035.09,2650) 1030,2800 1800,2800 cw(c1782.5,2652.5) 1930,2670 1930,1495 cw(c1782.5,1512.5) 1800,1365 1015,1365 cw(c1032.5,1512.5)

## Silkscreen, mask and mechanical layers (free items; w line width, h text height)
Top Overlay:
  lines w10: 915,2285 915,2445 ; 920,2550 920,2735 ; 1035,2535 1065,2565 ; 1665,2505 1665,2495 1690,2470
Mechanical 13:
  text "GPIO4" at 758.01,1985.42 h39.37
  text "VREF" at 1953.98,1975 h39.37
  text "GND" at 2057.78,1975.42 h39.37
  text "GPIO5" at 757.87,1940.42 h39.37
  text "USB_5V" at 2059.06,1936.99 h39.37
  text "GND" at 1957.78,1935.42 h39.37
  text "GPIO6" at 757.97,1885.42 h39.37
  text "GPIO27" at 1958.18,1885.42 h39.37
  text "GPIO7" at 757.97,1835.42 h39.37
  text "GPIO26" at 1958.18,1835.42 h39.37
  text "GPIO8" at 757.94,1790.42 h39.37
  text "GPIO18" at 1958.16,1790.42 h39.37
  text "GPIO9" at 757.94,1740.42 h39.37
  text "GPIO17" at 1958.18,1740.42 h39.37
  text "+3V3" at 770.21,1690.45 h39.37
  text "GPIO16" at 1958.18,1690.42 h39.37
  text "GND" at 772.78,1635.42 h39.37
  text "GPIO15" at 1958.08,1635.42 h39.37

## Text inside footprints (layer, text, board x,y; h text height)
J1: Mechanical 13 "PCB EDGE" at 1197.4,2813.43 h16 r180